# EAGLE board myPanel (EAGLE 7.7.0), part 1 of 2
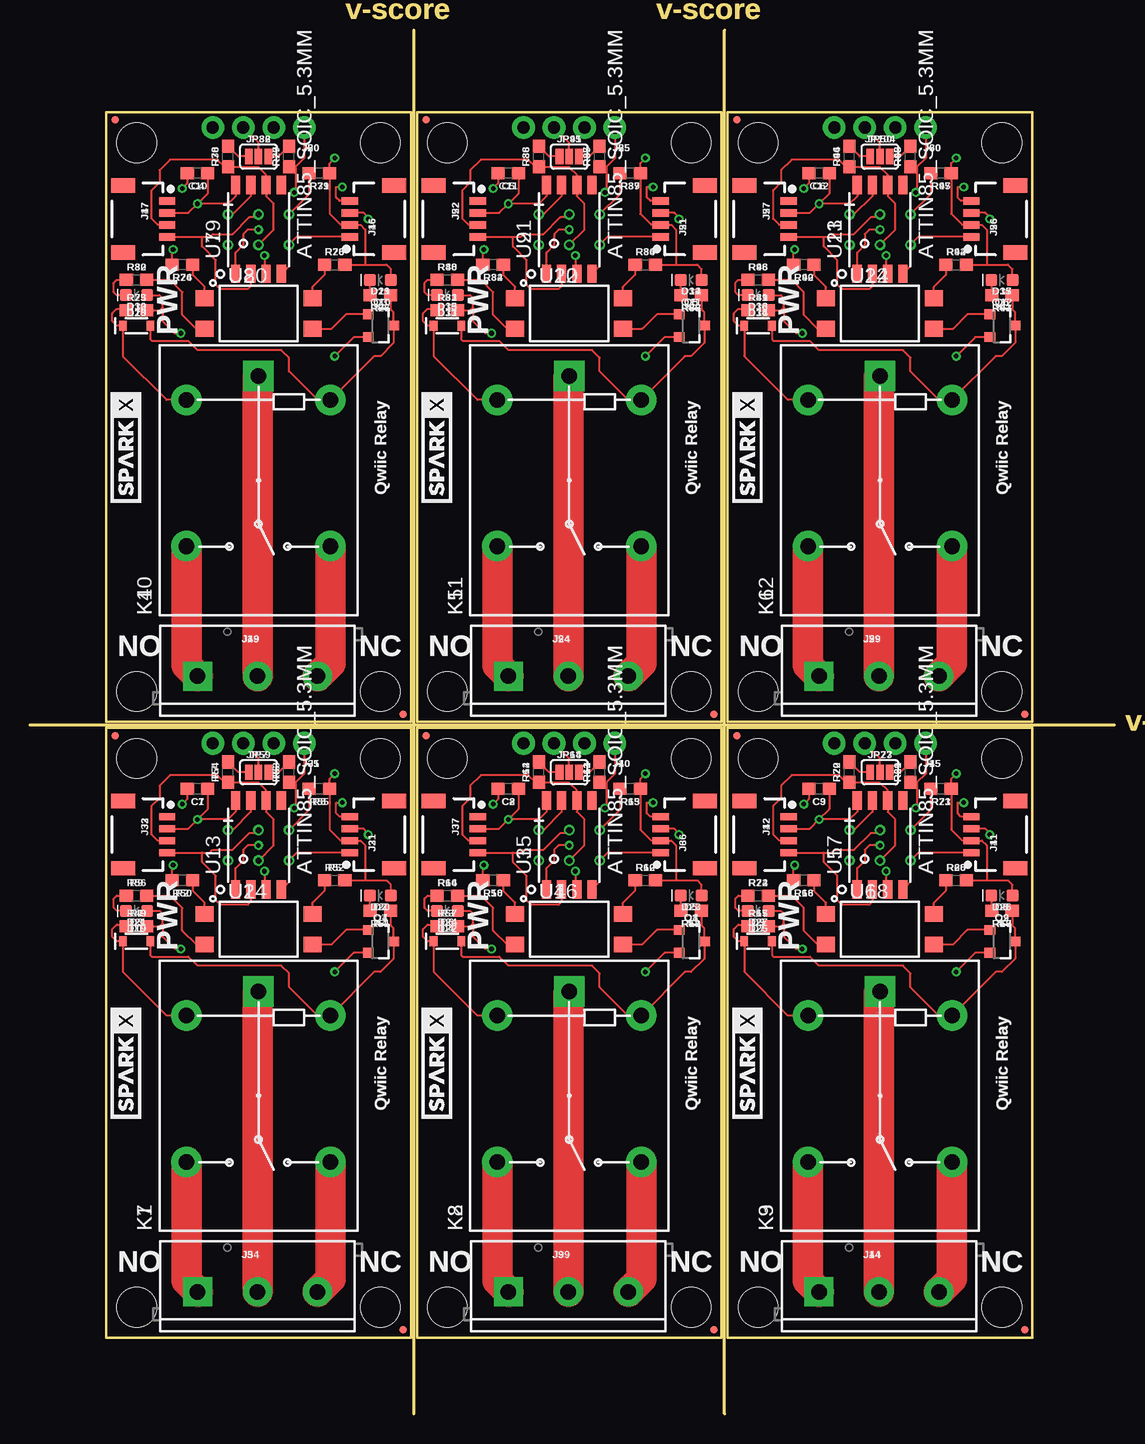
[diagram p0: board, top side]
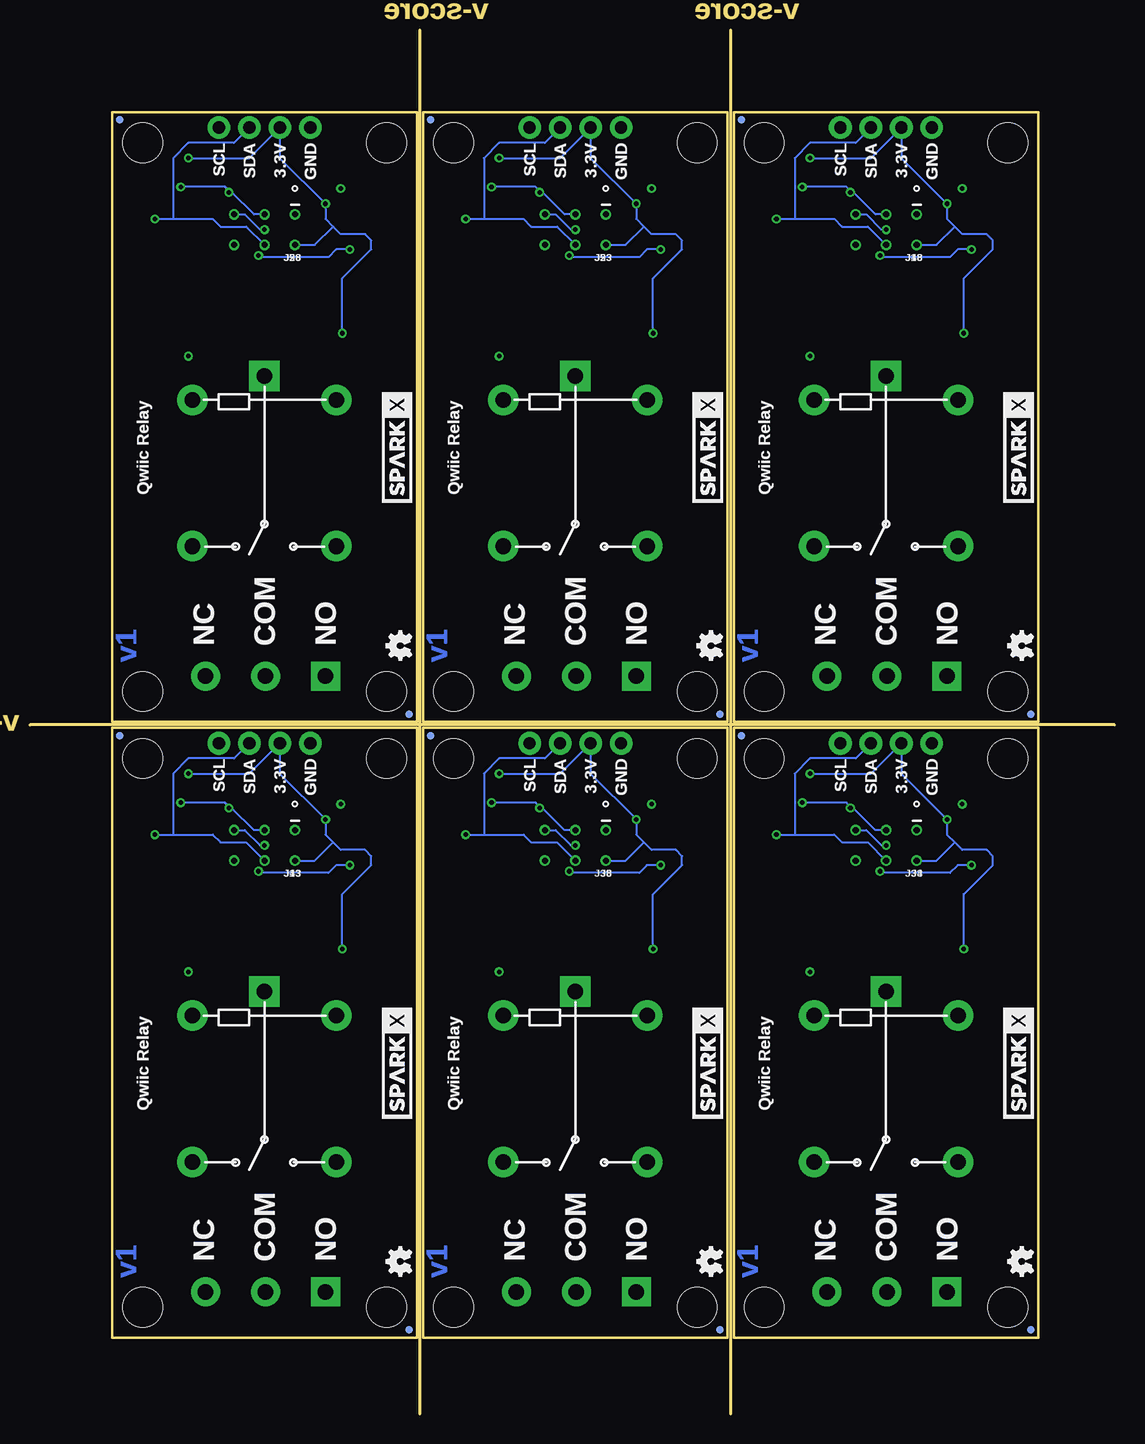
[diagram p1: board, bottom side, seen from below]

Size 90.42 x 115.32 mm. Coordinates in mm from the lower left corner, seen from the top.
Outline: 32,0 32,115.32
Outline: 57.91,0 57.91,115.32
Outline: 0,57.4 90.42,57.4
Outline: 6.35,6.35 31.75,6.35 31.75,57.15 6.35,57.15 6.35,6.35
Outline: 32.26,6.35 57.66,6.35 57.66,57.15 32.26,57.15 32.26,6.35
Outline: 58.17,6.35 83.57,6.35 83.57,57.15 58.17,57.15 58.17,6.35
Outline: 6.35,57.66 31.75,57.66 31.75,108.46 6.35,108.46 6.35,57.66
Outline: 32.26,57.66 57.66,57.66 57.66,108.46 32.26,108.46 32.26,57.66
Outline: 58.17,57.66 83.57,57.66 83.57,108.46 58.17,108.46 58.17,57.66
Copper layers (1*16): Top 0.035mm / dielectric 1.5mm / Bottom 0.035mm
Design rules "SparkFun-2-layer-PCBWay-LIMIT": minimum track width 6mil, minimum drill 0.3mm, track to track 6mil, track to pad 6mil, pad to pad 6mil, via to via 6mil, smd to smd 6mil, copper to edge 6mil, drill to drill 6mil, minimum pad ring 7mil, minimum via ring 7mil, stop-mask expansion 4mil, vias tented up to drill 25mil, thermal gap 10mil

## Footprints (pad centres in the part's own frame; a part is rotated, then mirrored left to right if it is on the bottom)
0603 = smd 1.1 x 1: 1 -0.85,0; 2 0.85,0
SOD-323 = smd 0.63 x 0.83: A 1.15,0; C -1.15,0
LED-0603 = smd 1 x 1: A -0.877,0; C 0.877,0
1X04_NO_SILK = drill 1.016 pad 1.88: 1 0,0; 2 2.54,0; 3 5.08,0; 4 7.62,0
1X04_1MM_RA = smd 0.6 x 1.35: 1 -1.5,0; 2 -0.5,0; 3 0.5,0; 4 1.5,0 | smd 1.2 x 2: NC1 2.8,-3.675; NC2 -2.8,-3.675
2X3_TEST_POINTS = drill 0.508: 1 -2.54,-1.27; 2 -2.54,1.27; 3 0,-1.27; 4 0,1.27; 5 2.54,-1.27; 6 2.54,1.27
SCREWTERMINAL-5MM-3 = drill 1.3 pad 2.413 square: 1 0,0 | drill 1.3 pad 2.413: 2 5,0; 3 10,0
STAND-OFF = hole 3.302: 0,0
MICRO-FIDUCIAL = smd 0.635 x 0.635: 1 0,0
SMT-JUMPER_3_2-NC_PASTE_SILK = smd 0.635 x 1.27: 1 -0.813,0; 2 0,0; 3 0.813,0
RELAY_SPDT_1C = drill 1.3 pad 2.54 square: 1 8.52,-0.005 | drill 1.3 pad 2.54: 2 6.52,5.995; 3 -5.68,5.995; 4 -5.68,-6.005; 5 6.52,-6.005
SOT23-3 = smd 0.8 x 0.9: 1 -0.95,-1; 2 0.95,-1; 3 0,1.1
ATTINY85 = smd 1.524 x 0.762: 1 -3.683,1.905; 2 -3.683,0.635; 3 -3.683,-0.635; 4 -3.683,-1.905; 5 3.727,-1.905; 6 3.727,-0.635; 7 3.727,0.635; 8 3.727,1.905
4PIN_DIP = smd 1.5 x 1.3: 1 -4.5,1.27; 2 -4.5,-1.27; 3 4.5,-1.27; 4 4.5,1.27

## Placement (x,y rotation side)
C1  10uF  [0603]  13.97,52.07 180 top
C2  10uF  [0603]  39.88,52.07 180 top
C3  10uF  [0603]  65.79,52.07 180 top
C4  10uF  [0603]  13.97,103.38 180 top
C5  10uF  [0603]  39.88,103.38 180 top
C6  10uF  [0603]  65.79,103.38 180 top
C7  10uF  [0603]  13.97,52.07 180 top
C8  10uF  [0603]  39.88,52.07 180 top
C9  10uF  [0603]  65.79,52.07 180 top
C10  10uF  [0603]  13.97,103.38 180 top
C11  10uF  [0603]  39.88,103.38 180 top
C12  10uF  [0603]  65.79,103.38 180 top
D1  1A/23V/620mV  [SOD-323]  8.89,39.37 0 top
D2  BLUE  [LED-0603]  29.21,43.18 180 top
D3  RED  [LED-0603]  8.89,41.91 180 top
D4  1A/23V/620mV  [SOD-323]  34.8,39.37 0 top
D5  BLUE  [LED-0603]  55.12,43.18 180 top
D6  RED  [LED-0603]  34.8,41.91 180 top
D7  1A/23V/620mV  [SOD-323]  60.71,39.37 0 top
D8  BLUE  [LED-0603]  81.03,43.18 180 top
D9  RED  [LED-0603]  60.71,41.91 180 top
D10  1A/23V/620mV  [SOD-323]  8.89,90.68 0 top
D11  BLUE  [LED-0603]  29.21,94.49 180 top
D12  RED  [LED-0603]  8.89,93.22 180 top
D13  1A/23V/620mV  [SOD-323]  34.8,90.68 0 top
D14  BLUE  [LED-0603]  55.12,94.49 180 top
D15  RED  [LED-0603]  34.8,93.22 180 top
D16  1A/23V/620mV  [SOD-323]  60.71,90.68 0 top
D17  BLUE  [LED-0603]  81.03,94.49 180 top
D18  RED  [LED-0603]  60.71,93.22 180 top
D19  1A/23V/620mV  [SOD-323]  8.89,39.37 0 top
D20  BLUE  [LED-0603]  29.21,43.18 180 top
D21  RED  [LED-0603]  8.89,41.91 180 top
D22  1A/23V/620mV  [SOD-323]  34.8,39.37 0 top
D23  BLUE  [LED-0603]  55.12,43.18 180 top
D24  RED  [LED-0603]  34.8,41.91 180 top
D25  1A/23V/620mV  [SOD-323]  60.71,39.37 0 top
D26  BLUE  [LED-0603]  81.03,43.18 180 top
D27  RED  [LED-0603]  60.71,41.91 180 top
D28  1A/23V/620mV  [SOD-323]  8.89,90.68 0 top
D29  BLUE  [LED-0603]  29.21,94.49 180 top
D30  RED  [LED-0603]  8.89,93.22 180 top
D31  1A/23V/620mV  [SOD-323]  34.8,90.68 0 top
D32  BLUE  [LED-0603]  55.12,94.49 180 top
D33  RED  [LED-0603]  34.8,93.22 180 top
D34  1A/23V/620mV  [SOD-323]  60.71,90.68 0 top
D35  BLUE  [LED-0603]  81.03,94.49 180 top
D36  RED  [LED-0603]  60.71,93.22 180 top
J1  [1X04_NO_SILK]  22.86,55.88 180 top
J2  Qwiic Right Angle  [1X04_1MM_RA]  26.67,48.26 90 top
J3  Qwiic Right Angle  [1X04_1MM_RA]  11.43,48.26 270 top
J4  AVR_SPI_PROG_3X2TESTPOINTS  [2X3_TEST_POINTS]  19.05,47.37 180 bottom
J5  [SCREWTERMINAL-5MM-3]  13.97,10.16 0 top
J6  Qwiic Right Angle  [1X04_1MM_RA]  52.58,48.26 90 top
J7  Qwiic Right Angle  [1X04_1MM_RA]  37.34,48.26 270 top
J8  AVR_SPI_PROG_3X2TESTPOINTS  [2X3_TEST_POINTS]  44.96,47.37 180 bottom
J9  [SCREWTERMINAL-5MM-3]  39.88,10.16 0 top
J10  [1X04_NO_SILK]  48.77,55.88 180 top
J11  Qwiic Right Angle  [1X04_1MM_RA]  78.49,48.26 90 top
J12  Qwiic Right Angle  [1X04_1MM_RA]  63.25,48.26 270 top
J13  AVR_SPI_PROG_3X2TESTPOINTS  [2X3_TEST_POINTS]  70.87,47.37 180 bottom
J14  [SCREWTERMINAL-5MM-3]  65.79,10.16 0 top
J15  [1X04_NO_SILK]  74.68,55.88 180 top
J16  Qwiic Right Angle  [1X04_1MM_RA]  26.67,99.57 90 top
J17  Qwiic Right Angle  [1X04_1MM_RA]  11.43,99.57 270 top
J18  AVR_SPI_PROG_3X2TESTPOINTS  [2X3_TEST_POINTS]  19.05,98.68 180 bottom
J19  [SCREWTERMINAL-5MM-3]  13.97,61.47 0 top
J20  [1X04_NO_SILK]  22.86,107.19 180 top
J21  Qwiic Right Angle  [1X04_1MM_RA]  52.58,99.57 90 top
J22  Qwiic Right Angle  [1X04_1MM_RA]  37.34,99.57 270 top
J23  AVR_SPI_PROG_3X2TESTPOINTS  [2X3_TEST_POINTS]  44.96,98.68 180 bottom
J24  [SCREWTERMINAL-5MM-3]  39.88,61.47 0 top
J25  [1X04_NO_SILK]  48.77,107.19 180 top
J26  Qwiic Right Angle  [1X04_1MM_RA]  78.49,99.57 90 top
J27  Qwiic Right Angle  [1X04_1MM_RA]  63.25,99.57 270 top
J28  AVR_SPI_PROG_3X2TESTPOINTS  [2X3_TEST_POINTS]  70.87,98.68 180 bottom
J29  [SCREWTERMINAL-5MM-3]  65.79,61.47 0 top
J30  [1X04_NO_SILK]  74.68,107.19 180 top
J31  Qwiic Right Angle  [1X04_1MM_RA]  26.67,48.26 90 top
J32  Qwiic Right Angle  [1X04_1MM_RA]  11.43,48.26 270 top
J33  AVR_SPI_PROG_3X2TESTPOINTS  [2X3_TEST_POINTS]  19.05,47.37 180 bottom
J34  [SCREWTERMINAL-5MM-3]  13.97,10.16 0 top
J35  [1X04_NO_SILK]  22.86,55.88 180 top
J36  Qwiic Right Angle  [1X04_1MM_RA]  52.58,48.26 90 top
J37  Qwiic Right Angle  [1X04_1MM_RA]  37.34,48.26 270 top
J38  AVR_SPI_PROG_3X2TESTPOINTS  [2X3_TEST_POINTS]  44.96,47.37 180 bottom
J39  [SCREWTERMINAL-5MM-3]  39.88,10.16 0 top
J40  [1X04_NO_SILK]  48.77,55.88 180 top
J41  Qwiic Right Angle  [1X04_1MM_RA]  78.49,48.26 90 top
J42  Qwiic Right Angle  [1X04_1MM_RA]  63.25,48.26 270 top
J43  AVR_SPI_PROG_3X2TESTPOINTS  [2X3_TEST_POINTS]  70.87,47.37 180 bottom
J44  [SCREWTERMINAL-5MM-3]  65.79,10.16 0 top
J45  [1X04_NO_SILK]  74.68,55.88 180 top
J46  Qwiic Right Angle  [1X04_1MM_RA]  26.67,99.57 90 top
J47  Qwiic Right Angle  [1X04_1MM_RA]  11.43,99.57 270 top
J48  AVR_SPI_PROG_3X2TESTPOINTS  [2X3_TEST_POINTS]  19.05,98.68 180 bottom
J49  [SCREWTERMINAL-5MM-3]  13.97,61.47 0 top
J50  [1X04_NO_SILK]  22.86,107.19 180 top
J51  Qwiic Right Angle  [1X04_1MM_RA]  52.58,99.57 90 top
J52  Qwiic Right Angle  [1X04_1MM_RA]  37.34,99.57 270 top
J53  AVR_SPI_PROG_3X2TESTPOINTS  [2X3_TEST_POINTS]  44.96,98.68 180 bottom
J54  [SCREWTERMINAL-5MM-3]  39.88,61.47 0 top
J55  [1X04_NO_SILK]  48.77,107.19 180 top
J56  Qwiic Right Angle  [1X04_1MM_RA]  78.49,99.57 90 top
J57  Qwiic Right Angle  [1X04_1MM_RA]  63.25,99.57 270 top
J58  AVR_SPI_PROG_3X2TESTPOINTS  [2X3_TEST_POINTS]  70.87,98.68 180 bottom
J59  [SCREWTERMINAL-5MM-3]  65.79,61.47 0 top
J60  [1X04_NO_SILK]  74.68,107.19 180 top
JP1  STAND-OFF  [STAND-OFF]  8.89,8.89 0 top
JP2  FIDUCIALUFIDUCIAL  [MICRO-FIDUCIAL]  31.12,56.52 0 bottom
JP3  STAND-OFF  [STAND-OFF]  8.89,54.61 0 top
JP4  STAND-OFF  [STAND-OFF]  29.21,54.61 0 top
JP5  STAND-OFF  [STAND-OFF]  29.21,8.89 0 top
JP6  FIDUCIALUFIDUCIAL  [MICRO-FIDUCIAL]  6.98,6.98 0 bottom
JP7  [SMT-JUMPER_3_2-NC_PASTE_SILK]  19.05,53.47 0 top
JP8  FIDUCIALUFIDUCIAL  [MICRO-FIDUCIAL]  31.12,6.98 0 top
JP9  FIDUCIALUFIDUCIAL  [MICRO-FIDUCIAL]  7.11,56.52 0 top
JP10  STAND-OFF  [STAND-OFF]  34.8,54.61 0 top
JP11  STAND-OFF  [STAND-OFF]  55.12,54.61 0 top
JP12  FIDUCIALUFIDUCIAL  [MICRO-FIDUCIAL]  57.02,56.52 0 bottom
JP13  FIDUCIALUFIDUCIAL  [MICRO-FIDUCIAL]  32.89,6.98 0 bottom
JP14  [SMT-JUMPER_3_2-NC_PASTE_SILK]  44.96,53.47 0 top
JP15  STAND-OFF  [STAND-OFF]  34.8,8.89 0 top
JP16  STAND-OFF  [STAND-OFF]  55.12,8.89 0 top
JP17  FIDUCIALUFIDUCIAL  [MICRO-FIDUCIAL]  57.02,6.98 0 top
JP18  FIDUCIALUFIDUCIAL  [MICRO-FIDUCIAL]  33.02,56.52 0 top
JP19  STAND-OFF  [STAND-OFF]  60.71,54.61 0 top
JP20  STAND-OFF  [STAND-OFF]  81.03,54.61 0 top
JP21  FIDUCIALUFIDUCIAL  [MICRO-FIDUCIAL]  82.93,56.52 0 bottom
JP22  FIDUCIALUFIDUCIAL  [MICRO-FIDUCIAL]  58.8,6.98 0 bottom
JP23  [SMT-JUMPER_3_2-NC_PASTE_SILK]  70.87,53.47 0 top
JP24  STAND-OFF  [STAND-OFF]  60.71,8.89 0 top
JP25  STAND-OFF  [STAND-OFF]  81.03,8.89 0 top
JP26  FIDUCIALUFIDUCIAL  [MICRO-FIDUCIAL]  82.93,6.98 0 top
JP27  FIDUCIALUFIDUCIAL  [MICRO-FIDUCIAL]  58.93,56.52 0 top
JP28  STAND-OFF  [STAND-OFF]  8.89,105.92 0 top
JP29  STAND-OFF  [STAND-OFF]  29.21,105.92 0 top
JP30  FIDUCIALUFIDUCIAL  [MICRO-FIDUCIAL]  31.12,107.82 0 bottom
JP31  FIDUCIALUFIDUCIAL  [MICRO-FIDUCIAL]  6.98,58.29 0 bottom
JP32  [SMT-JUMPER_3_2-NC_PASTE_SILK]  19.05,104.77 0 top
JP33  STAND-OFF  [STAND-OFF]  8.89,60.2 0 top
JP34  STAND-OFF  [STAND-OFF]  29.21,60.2 0 top
JP35  FIDUCIALUFIDUCIAL  [MICRO-FIDUCIAL]  31.12,58.29 0 top
JP36  FIDUCIALUFIDUCIAL  [MICRO-FIDUCIAL]  7.11,107.82 0 top
JP37  STAND-OFF  [STAND-OFF]  34.8,105.92 0 top
JP38  STAND-OFF  [STAND-OFF]  55.12,105.92 0 top
JP39  FIDUCIALUFIDUCIAL  [MICRO-FIDUCIAL]  57.02,107.82 0 bottom
JP40  FIDUCIALUFIDUCIAL  [MICRO-FIDUCIAL]  32.89,58.29 0 bottom
JP41  [SMT-JUMPER_3_2-NC_PASTE_SILK]  44.96,104.77 0 top
JP42  STAND-OFF  [STAND-OFF]  34.8,60.2 0 top
JP43  STAND-OFF  [STAND-OFF]  55.12,60.2 0 top
JP44  FIDUCIALUFIDUCIAL  [MICRO-FIDUCIAL]  57.02,58.29 0 top
JP45  FIDUCIALUFIDUCIAL  [MICRO-FIDUCIAL]  33.02,107.82 0 top
JP46  STAND-OFF  [STAND-OFF]  60.71,105.92 0 top
JP47  STAND-OFF  [STAND-OFF]  81.03,105.92 0 top
JP48  FIDUCIALUFIDUCIAL  [MICRO-FIDUCIAL]  82.93,107.82 0 bottom
JP49  FIDUCIALUFIDUCIAL  [MICRO-FIDUCIAL]  58.8,58.29 0 bottom
JP50  [SMT-JUMPER_3_2-NC_PASTE_SILK]  70.87,104.77 0 top
JP51  STAND-OFF  [STAND-OFF]  60.71,60.2 0 top
JP52  STAND-OFF  [STAND-OFF]  81.03,60.2 0 top
JP53  FIDUCIALUFIDUCIAL  [MICRO-FIDUCIAL]  82.93,58.29 0 top
JP54  FIDUCIALUFIDUCIAL  [MICRO-FIDUCIAL]  58.93,107.82 0 top
JP55  STAND-OFF  [STAND-OFF]  8.89,54.61 0 top
JP56  STAND-OFF  [STAND-OFF]  29.21,54.61 0 top
JP57  FIDUCIALUFIDUCIAL  [MICRO-FIDUCIAL]  31.12,56.52 0 bottom
JP58  FIDUCIALUFIDUCIAL  [MICRO-FIDUCIAL]  6.98,6.98 0 bottom
JP59  [SMT-JUMPER_3_2-NC_PASTE_SILK]  19.05,53.47 0 top
JP60  STAND-OFF  [STAND-OFF]  8.89,8.89 0 top
JP61  STAND-OFF  [STAND-OFF]  29.21,8.89 0 top
JP62  FIDUCIALUFIDUCIAL  [MICRO-FIDUCIAL]  31.12,6.98 0 top
JP63  FIDUCIALUFIDUCIAL  [MICRO-FIDUCIAL]  7.11,56.52 0 top
JP64  STAND-OFF  [STAND-OFF]  34.8,54.61 0 top
JP65  STAND-OFF  [STAND-OFF]  55.12,54.61 0 top
JP66  FIDUCIALUFIDUCIAL  [MICRO-FIDUCIAL]  57.02,56.52 0 bottom
JP67  FIDUCIALUFIDUCIAL  [MICRO-FIDUCIAL]  32.89,6.98 0 bottom
JP68  [SMT-JUMPER_3_2-NC_PASTE_SILK]  44.96,53.47 0 top
JP69  STAND-OFF  [STAND-OFF]  34.8,8.89 0 top
JP70  STAND-OFF  [STAND-OFF]  55.12,8.89 0 top
JP71  FIDUCIALUFIDUCIAL  [MICRO-FIDUCIAL]  57.02,6.98 0 top
JP72  FIDUCIALUFIDUCIAL  [MICRO-FIDUCIAL]  33.02,56.52 0 top
JP73  STAND-OFF  [STAND-OFF]  60.71,54.61 0 top
JP74  STAND-OFF  [STAND-OFF]  81.03,54.61 0 top
JP75  FIDUCIALUFIDUCIAL  [MICRO-FIDUCIAL]  82.93,56.52 0 bottom
JP76  FIDUCIALUFIDUCIAL  [MICRO-FIDUCIAL]  58.8,6.98 0 bottom
JP77  [SMT-JUMPER_3_2-NC_PASTE_SILK]  70.87,53.47 0 top
JP78  STAND-OFF  [STAND-OFF]  60.71,8.89 0 top
JP79  STAND-OFF  [STAND-OFF]  81.03,8.89 0 top
JP80  FIDUCIALUFIDUCIAL  [MICRO-FIDUCIAL]  82.93,6.98 0 top
JP81  FIDUCIALUFIDUCIAL  [MICRO-FIDUCIAL]  58.93,56.52 0 top
JP82  STAND-OFF  [STAND-OFF]  8.89,105.92 0 top
JP83  STAND-OFF  [STAND-OFF]  29.21,105.92 0 top
JP84  FIDUCIALUFIDUCIAL  [MICRO-FIDUCIAL]  31.12,107.82 0 bottom
JP85  FIDUCIALUFIDUCIAL  [MICRO-FIDUCIAL]  6.98,58.29 0 bottom
JP86  [SMT-JUMPER_3_2-NC_PASTE_SILK]  19.05,104.77 0 top
JP87  STAND-OFF  [STAND-OFF]  8.89,60.2 0 top
JP88  STAND-OFF  [STAND-OFF]  29.21,60.2 0 top
JP89  FIDUCIALUFIDUCIAL  [MICRO-FIDUCIAL]  31.12,58.29 0 top
JP90  FIDUCIALUFIDUCIAL  [MICRO-FIDUCIAL]  7.11,107.82 0 top
JP91  STAND-OFF  [STAND-OFF]  34.8,105.92 0 top
JP92  STAND-OFF  [STAND-OFF]  55.12,105.92 0 top
JP93  FIDUCIALUFIDUCIAL  [MICRO-FIDUCIAL]  57.02,107.82 0 bottom
JP94  FIDUCIALUFIDUCIAL  [MICRO-FIDUCIAL]  32.89,58.29 0 bottom
JP95  [SMT-JUMPER_3_2-NC_PASTE_SILK]  44.96,104.77 0 top
JP96  STAND-OFF  [STAND-OFF]  34.8,60.2 0 top
JP97  STAND-OFF  [STAND-OFF]  55.12,60.2 0 top
JP98  FIDUCIALUFIDUCIAL  [MICRO-FIDUCIAL]  57.02,58.29 0 top
JP99  FIDUCIALUFIDUCIAL  [MICRO-FIDUCIAL]  33.02,107.82 0 top
JP100  STAND-OFF  [STAND-OFF]  60.71,105.92 0 top
JP101  STAND-OFF  [STAND-OFF]  81.03,105.92 0 top
JP102  FIDUCIALUFIDUCIAL  [MICRO-FIDUCIAL]  82.93,107.82 0 bottom
JP103  FIDUCIALUFIDUCIAL  [MICRO-FIDUCIAL]  58.8,58.29 0 bottom
JP104  [SMT-JUMPER_3_2-NC_PASTE_SILK]  70.87,104.77 0 top
JP105  STAND-OFF  [STAND-OFF]  60.71,60.2 0 top
JP106  STAND-OFF  [STAND-OFF]  81.03,60.2 0 top
JP107  FIDUCIALUFIDUCIAL  [MICRO-FIDUCIAL]  82.93,58.29 0 top
JP108  FIDUCIALUFIDUCIAL  [MICRO-FIDUCIAL]  58.93,107.82 0 top
K1  [RELAY_SPDT_1C]  19.05,26.67 90 top
K2  [RELAY_SPDT_1C]  44.96,26.67 90 top
K3  [RELAY_SPDT_1C]  70.87,26.67 90 top
K4  [RELAY_SPDT_1C]  19.05,77.98 90 top
K5  [RELAY_SPDT_1C]  44.96,77.98 90 top
K6  [RELAY_SPDT_1C]  70.87,77.98 90 top
K7  [RELAY_SPDT_1C]  19.05,26.67 90 top
K8  [RELAY_SPDT_1C]  44.96,26.67 90 top
K9  [RELAY_SPDT_1C]  70.87,26.67 90 top
K10  [RELAY_SPDT_1C]  19.05,77.98 90 top
K11  [RELAY_SPDT_1C]  44.96,77.98 90 top
K12  [RELAY_SPDT_1C]  70.87,77.98 90 top
LOGO1  OSHW-LOGOMINI  [OSHW-LOGO-MINI]  7.75,12.7 90 bottom
LOGO2  OSHW-LOGOMINI  [OSHW-LOGO-MINI]  33.66,12.7 90 bottom
LOGO3  OSHW-LOGOMINI  [OSHW-LOGO-MINI]  59.56,12.7 90 bottom
LOGO4  OSHW-LOGOMINI  [OSHW-LOGO-MINI]  7.75,64.01 90 bottom
LOGO5  OSHW-LOGOMINI  [OSHW-LOGO-MINI]  33.66,64.01 90 bottom
LOGO6  OSHW-LOGOMINI  [OSHW-LOGO-MINI]  59.56,64.01 90 bottom
LOGO7  OSHW-LOGOMINI  [OSHW-LOGO-MINI]  7.75,12.7 90 bottom
LOGO8  OSHW-LOGOMINI  [OSHW-LOGO-MINI]  33.66,12.7 90 bottom
LOGO9  OSHW-LOGOMINI  [OSHW-LOGO-MINI]  59.56,12.7 90 bottom
LOGO10  OSHW-LOGOMINI  [OSHW-LOGO-MINI]  7.75,64.01 90 bottom
LOGO11  OSHW-LOGOMINI  [OSHW-LOGO-MINI]  33.66,64.01 90 bottom
LOGO12  OSHW-LOGOMINI  [OSHW-LOGO-MINI]  59.56,64.01 90 bottom
Q1  600mA/40V  [SOT23-3]  55.12,39.37 270 top
Q2  600mA/40V  [SOT23-3]  81.03,39.37 270 top
Q3  600mA/40V  [SOT23-3]  29.21,90.68 270 top
Q4  600mA/40V  [SOT23-3]  29.21,39.37 270 top
Q5  600mA/40V  [SOT23-3]  55.12,90.68 270 top
Q6  600mA/40V  [SOT23-3]  81.03,90.68 270 top
Q7  600mA/40V  [SOT23-3]  29.21,39.37 270 top
Q8  600mA/40V  [SOT23-3]  55.12,39.37 270 top
Q9  600mA/40V  [SOT23-3]  81.03,39.37 270 top
Q10  600mA/40V  [SOT23-3]  29.21,90.68 270 top
Q11  600mA/40V  [SOT23-3]  55.12,90.68 270 top
Q12  600mA/40V  [SOT23-3]  81.03,90.68 270 top
R1  10  [0603]  8.89,40.64 0 top
R2  100  [0603]  12.7,44.45 180 top
R3  10  [0603]  34.8,40.64 0 top
R4  330  [0603]  29.21,41.91 180 top
R5  330  [0603]  25.4,44.45 0 top
R6  2.2K  [0603]  21.59,53.47 90 top
R7  2.2K  [0603]  16.51,53.47 90 top
R8  10K  [0603]  24.13,52.07 180 top
R9  1k  [0603]  8.89,43.18 0 top
R10  100  [0603]  38.61,44.45 180 top
R11  330  [0603]  55.12,41.91 180 top
R12  330  [0603]  51.31,44.45 0 top
R13  2.2K  [0603]  47.5,53.47 90 top
R14  2.2K  [0603]  42.42,53.47 90 top
R15  10K  [0603]  50.04,52.07 180 top
R16  1k  [0603]  34.8,43.18 0 top
R17  10  [0603]  60.71,40.64 0 top
R18  100  [0603]  64.52,44.45 180 top
R19  330  [0603]  81.03,41.91 180 top
R20  330  [0603]  77.22,44.45 0 top
R21  2.2K  [0603]  73.41,53.47 90 top
R22  2.2K  [0603]  68.33,53.47 90 top
R23  10K  [0603]  75.95,52.07 180 top
R24  1k  [0603]  60.71,43.18 0 top
R25  10  [0603]  8.89,91.95 0 top
R26  100  [0603]  12.7,95.76 180 top
R27  330  [0603]  29.21,93.22 180 top
R28  330  [0603]  25.4,95.76 0 top
R29  2.2K  [0603]  21.59,104.77 90 top
R30  2.2K  [0603]  16.51,104.77 90 top
R31  10K  [0603]  24.13,103.38 180 top
R32  1k  [0603]  8.89,94.49 0 top
R33  10  [0603]  34.8,91.95 0 top
R34  100  [0603]  38.61,95.76 180 top
R35  330  [0603]  55.12,93.22 180 top
R36  330  [0603]  51.31,95.76 0 top
R37  2.2K  [0603]  47.5,104.77 90 top
R38  2.2K  [0603]  42.42,104.77 90 top
R39  10K  [0603]  50.04,103.38 180 top
R40  1k  [0603]  34.8,94.49 0 top
R41  10  [0603]  60.71,91.95 0 top
R42  100  [0603]  64.52,95.76 180 top
R43  330  [0603]  81.03,93.22 180 top
R44  330  [0603]  77.22,95.76 0 top
R45  2.2K  [0603]  73.41,104.77 90 top
R46  2.2K  [0603]  68.33,104.77 90 top
R47  10K  [0603]  75.95,103.38 180 top
R48  1k  [0603]  60.71,94.49 0 top
R49  10  [0603]  8.89,40.64 0 top
R50  100  [0603]  12.7,44.45 180 top
R51  330  [0603]  29.21,41.91 180 top
R52  330  [0603]  25.4,44.45 0 top
R53  2.2K  [0603]  21.59,53.47 90 top
R54  2.2K  [0603]  16.51,53.47 90 top
R55  10K  [0603]  24.13,52.07 180 top
R56  1k  [0603]  8.89,43.18 0 top
R57  10  [0603]  34.8,40.64 0 top
R58  100  [0603]  38.61,44.45 180 top
R59  330  [0603]  55.12,41.91 180 top
R60  330  [0603]  51.31,44.45 0 top
R61  2.2K  [0603]  47.5,53.47 90 top
R62  2.2K  [0603]  42.42,53.47 90 top
R63  10K  [0603]  50.04,52.07 180 top
R64  1k  [0603]  34.8,43.18 0 top
R65  10  [0603]  60.71,40.64 0 top
R66  100  [0603]  64.52,44.45 180 top
R67  330  [0603]  81.03,41.91 180 top
R68  330  [0603]  77.22,44.45 0 top
R69  2.2K  [0603]  73.41,53.47 90 top
R70  2.2K  [0603]  68.33,53.47 90 top
R71  10K  [0603]  75.95,52.07 180 top
R72  1k  [0603]  60.71,43.18 0 top
R73  10  [0603]  8.89,91.95 0 top
R74  100  [0603]  12.7,95.76 180 top
R75  330  [0603]  29.21,93.22 180 top
R76  330  [0603]  25.4,95.76 0 top
R77  2.2K  [0603]  21.59,104.77 90 top
R78  2.2K  [0603]  16.51,104.77 90 top
R79  10K  [0603]  24.13,103.38 180 top
R80  1k  [0603]  8.89,94.49 0 top
R81  10  [0603]  34.8,91.95 0 top
R82  100  [0603]  38.61,95.76 180 top
R83  330  [0603]  55.12,93.22 180 top
R84  330  [0603]  51.31,95.76 0 top
R85  2.2K  [0603]  47.5,104.77 90 top
R86  2.2K  [0603]  42.42,104.77 90 top
R87  10K  [0603]  50.04,103.38 180 top
R88  1k  [0603]  34.8,94.49 0 top
R89  10  [0603]  60.71,91.95 0 top
R90  100  [0603]  64.52,95.76 180 top
R91  330  [0603]  81.03,93.22 180 top
R92  330  [0603]  77.22,95.76 0 top
R93  2.2K  [0603]  73.41,104.77 90 top
R94  2.2K  [0603]  68.33,104.77 90 top
R95  10K  [0603]  75.95,103.38 180 top
R96  1k  [0603]  60.71,94.49 0 top
U1  ATTIN85_SOIC_5.3MM  [ATTINY85]  19.05,47.37 90 top
U2  OPTO_ISOLATOR_DIP  [4PIN_DIP]  19.05,40.39 0 top
U3  ATTIN85_SOIC_5.3MM  [ATTINY85]  44.96,47.37 90 top
U4  OPTO_ISOLATOR_DIP  [4PIN_DIP]  44.96,40.39 0 top
U5  ATTIN85_SOIC_5.3MM  [ATTINY85]  70.87,47.37 90 top
U6  OPTO_ISOLATOR_DIP  [4PIN_DIP]  70.87,40.39 0 top
U7  ATTIN85_SOIC_5.3MM  [ATTINY85]  19.05,98.68 90 top
U8  OPTO_ISOLATOR_DIP  [4PIN_DIP]  19.05,91.69 0 top
U9  ATTIN85_SOIC_5.3MM  [ATTINY85]  44.96,98.68 90 top
U10  OPTO_ISOLATOR_DIP  [4PIN_DIP]  44.96,91.69 0 top
U11  ATTIN85_SOIC_5.3MM  [ATTINY85]  70.87,98.68 90 top
U12  OPTO_ISOLATOR_DIP  [4PIN_DIP]  70.87,91.69 0 top
U13  ATTIN85_SOIC_5.3MM  [ATTINY85]  19.05,47.37 90 top
U14  OPTO_ISOLATOR_DIP  [4PIN_DIP]  19.05,40.39 0 top
U15  ATTIN85_SOIC_5.3MM  [ATTINY85]  44.96,47.37 90 top
U16  OPTO_ISOLATOR_DIP  [4PIN_DIP]  44.96,40.39 0 top
U17  ATTIN85_SOIC_5.3MM  [ATTINY85]  70.87,47.37 90 top
U18  OPTO_ISOLATOR_DIP  [4PIN_DIP]  70.87,40.39 0 top
U19  ATTIN85_SOIC_5.3MM  [ATTINY85]  19.05,98.68 90 top
U20  OPTO_ISOLATOR_DIP  [4PIN_DIP]  19.05,91.69 0 top
U21  ATTIN85_SOIC_5.3MM  [ATTINY85]  44.96,98.68 90 top
U22  OPTO_ISOLATOR_DIP  [4PIN_DIP]  44.96,91.69 0 top
U23  ATTIN85_SOIC_5.3MM  [ATTINY85]  70.87,98.68 90 top
U24  OPTO_ISOLATOR_DIP  [4PIN_DIP]  70.87,91.69 0 top
U$1  SPARKX-LOGO4  [SPARKX-MEDIUM]  33.91,29.21 90 top
U$2  SPARKX-LOGO4  [SPARKX-MEDIUM]  33.91,29.21 90 bottom
U$3  SPARKX-LOGO4  [SPARKX-MEDIUM]  8,29.21 90 top
U$4  SPARKX-LOGO4  [SPARKX-MEDIUM]  8,29.21 90 bottom
U$5  SPARKX-LOGO4  [SPARKX-MEDIUM]  59.82,29.21 90 top
U$6  SPARKX-LOGO4  [SPARKX-MEDIUM]  59.82,29.21 90 bottom
U$7  SPARKX-LOGO4  [SPARKX-MEDIUM]  8,80.52 90 top
U$8  SPARKX-LOGO4  [SPARKX-MEDIUM]  8,80.52 90 bottom
U$9  SPARKX-LOGO4  [SPARKX-MEDIUM]  33.91,80.52 90 top
U$10  SPARKX-LOGO4  [SPARKX-MEDIUM]  33.91,80.52 90 bottom
U$11  SPARKX-LOGO4  [SPARKX-MEDIUM]  59.82,80.52 90 top
U$12  SPARKX-LOGO4  [SPARKX-MEDIUM]  59.82,80.52 90 bottom
U$13  SPARKX-LOGO4  [SPARKX-MEDIUM]  8,29.21 90 top
U$14  SPARKX-LOGO4  [SPARKX-MEDIUM]  8,29.21 90 bottom
U$15  SPARKX-LOGO4  [SPARKX-MEDIUM]  33.91,29.21 90 top
U$16  SPARKX-LOGO4  [SPARKX-MEDIUM]  33.91,29.21 90 bottom
U$17  SPARKX-LOGO4  [SPARKX-MEDIUM]  59.82,29.21 90 top
U$18  SPARKX-LOGO4  [SPARKX-MEDIUM]  59.82,29.21 90 bottom
U$19  SPARKX-LOGO4  [SPARKX-MEDIUM]  8,80.52 90 top
U$20  SPARKX-LOGO4  [SPARKX-MEDIUM]  8,80.52 90 bottom
U$21  SPARKX-LOGO4  [SPARKX-MEDIUM]  33.91,80.52 90 top
U$22  SPARKX-LOGO4  [SPARKX-MEDIUM]  33.91,80.52 90 bottom
U$23  SPARKX-LOGO4  [SPARKX-MEDIUM]  59.82,80.52 90 top
U$24  SPARKX-LOGO4  [SPARKX-MEDIUM]  59.82,80.52 90 bottom

## Library data of the parts
C1-C12 = SparkFun-Capacitors; PROD_ID: CAP-11015
D1 D4 D7 D10 D13 D16 D19 D22 D25 D28 D31 D34 = SparkFun-DiscreteSemi; PROD_ID: DIO-11623
D2 D5 D8 D11 D14 D17 D20 D23 D26 D29 D32 D35 = SparkFun-LED; PROD_ID: DIO-08575
D3 D6 D9 D12 D15 D18 D21 D24 D27 D30 D33 D36 = SparkFun-LED; PROD_ID: DIO-00819
J1 J10 J15 J20 J25 J30 J35 J40 J45 J50 J55 J60 = SparkFun-Connectors; PROD_ID: CONN-09696
J2 J3 J6 J7 J11 J12 J16 J17 J21 J22 J26 J27 J31 J32 J36 J37 J41 J42 J46 J47 J51 J52 J56 J57 = SparkFun-Connectors; PROD_ID: CONN-13694
J4 J8 J13 J18 J23 J28 J33 J38 J43 J48 J53 J58 = SparkFun-Connectors
J5 J9 J14 J19 J24 J29 J34 J39 J44 J49 J54 J59 = SparkFun-Connectors; PROD_ID: CONN-10134; SF_SKU: PRT-08433
JP1-JP6 JP8-JP13 JP15-JP22 JP24-JP31 JP33-JP40 JP42-JP49 JP51-JP58 JP60-JP67 JP69-JP76 JP78-JP85 JP87-JP94 JP96-JP103 JP105-JP108 = SparkFun
JP7 JP14 JP23 JP32 JP41 JP50 JP59 JP68 JP77 JP86 JP95 JP104 = SparkFun-Jumpers
K1-K12 = Relay_SPDT
LOGO1-LOGO12 = SparkFun-Aesthetics
Q1-Q12 = SparkFun-DiscreteSemi; PROD_ID: TRANS-08049
R1 R3 R17 R25 R33 R41 R49 R57 R65 R73 R81 R89 = SparkFun-Resistors; PROD_ID: RES-07871
R2 R10 R18 R26 R34 R42 R50 R58 R66 R74 R82 R90 = SparkFun-Resistors; PROD_ID: RES-12438
R4 R11 R19 R27 R35 R43 R51 R59 R67 R75 R83 R91 = SparkFun-Resistors; PROD_ID: RES_10328
R5 R8 R9 R12 R15 R16 R20 R23 R24 R28 R31 R32 R36 R39 R40 R44 R47 R48 R52 R55 R56 R60 R63 R64 R68 R71 R72 R76 R79 R80 R84 R87 R88 R92 R95 R96 = SparkFun-Resistors; PROD_ID: RES-00818
R6 R7 R13 R14 R21 R22 R29 R30 R37 R38 R45 R46 R53 R54 R61 R62 R69 R70 R77 R78 R85 R86 R93 R94 = SparkFun-Resistors; PROD_ID: RES-07857
U1 U3 U5 U7 U9 U11 U13 U15 U17 U19 U21 U23 = attiny85
U2 U4 U6 U8 U10 U12 U14 U16 U18 U20 U22 U24 = LTV-816
U$1-U$24 = SparkX

## Nets
3.3V: C1.1 D2.A D3.A J1.3 J2.2 J3.2 J4.2 JP7.2 R1.2 R5.2 R8.1 U1.8
3.3V1: C2.1 D5.A D6.A J6.2 J7.2 J8.2 J10.3 JP14.2 R3.2 R12.2 R15.1 U3.8
3.3V2: C3.1 D8.A D9.A J11.2 J12.2 J13.2 J15.3 JP23.2 R17.2 R20.2 R23.1 U5.8
3.3V3: C4.1 D11.A D12.A J16.2 J17.2 J18.2 J20.3 JP32.2 R25.2 R28.2 R31.1 U7.8
3.3V4: C5.1 D14.A D15.A J21.2 J22.2 J23.2 J25.3 JP41.2 R33.2 R36.2 R39.1 U9.8
3.3V5: C6.1 D17.A D18.A J26.2 J27.2 J28.2 J30.3 JP50.2 R41.2 R44.2 R47.1 U11.8
3.3V6: C7.1 D20.A D21.A J31.2 J32.2 J33.2 J35.3 JP59.2 R49.2 R52.2 R55.1 U13.8
3.3V7: C8.1 D23.A D24.A J36.2 J37.2 J38.2 J40.3 JP68.2 R57.2 R60.2 R63.1 U15.8
3.3V8: C9.1 D26.A D27.A J41.2 J42.2 J43.2 J45.3 JP77.2 R65.2 R68.2 R71.1 U17.8
3.3V9: C10.1 D29.A D30.A J46.2 J47.2 J48.2 J50.3 JP86.2 R73.2 R76.2 R79.1 U19.8
3.3V10: C11.1 D32.A D33.A J51.2 J52.2 J53.2 J55.3 JP95.2 R81.2 R84.2 R87.1 U21.8
3.3V11: C12.1 D35.A D36.A J56.2 J57.2 J58.2 J60.3 JP104.2 R89.2 R92.2 R95.1 U23.8
!RESET: J4.5 R8.2 U1.1
!RESET1: J8.5 R15.2 U3.1
!RESET2: J13.5 R23.2 U5.1
!RESET3: J18.5 R31.2 U7.1
!RESET4: J23.5 R39.2 U9.1
!RESET5: J28.5 R47.2 U11.1
!RESET6: J33.5 R55.2 U13.1
!RESET7: J38.5 R63.2 U15.1
!RESET8: J43.5 R71.2 U17.1
!RESET9: J48.5 R79.2 U19.1
!RESET10: J53.5 R87.2 U21.1
!RESET11: J58.5 R95.2 U23.1
COM: J5.2 K1.1
COM1: J9.2 K2.1
COM2: J14.2 K3.1
COM3: J19.2 K4.1
COM4: J24.2 K5.1
COM5: J29.2 K6.1
COM6: J34.2 K7.1
COM7: J39.2 K8.1
COM8: J44.2 K9.1
COM9: J49.2 K10.1
COM10: J54.2 K11.1
COM11: J59.2 K12.1
GND: C1.2 J1.4 J2.1 J3.1 J4.6 Q4.2 R9.2 U1.4 U2.2
GND1: C2.2 J6.1 J7.1 J8.6 J10.4 Q1.2 R16.2 U3.4 U4.2
GND2: C3.2 J11.1 J12.1 J13.6 J15.4 Q2.2 R24.2 U5.4 U6.2
GND3: C4.2 J16.1 J17.1 J18.6 J20.4 Q3.2 R32.2 U7.4 U8.2
GND4: C5.2 J21.1 J22.1 J23.6 J25.4 Q5.2 R40.2 U9.4 U10.2
GND5: C6.2 J26.1 J27.1 J28.6 J30.4 Q6.2 R48.2 U11.4 U12.2
GND6: C7.2 J31.1 J32.1 J33.6 J35.4 Q7.2 R56.2 U13.4 U14.2
GND7: C8.2 J36.1 J37.1 J38.6 J40.4 Q8.2 R64.2 U15.4 U16.2
GND8: C9.2 J41.1 J42.1 J43.6 J45.4 Q9.2 R72.2 U17.4 U18.2
GND9: C10.2 J46.1 J47.1 J48.6 J50.4 Q10.2 R80.2 U19.4 U20.2
GND10: C11.2 J51.1 J52.1 J53.6 J55.4 Q11.2 R88.2 U21.4 U22.2
GND11: C12.2 J56.1 J57.1 J58.6 J60.4 Q12.2 R96.2 U23.4 U24.2
MISO: J4.1 U1.7
MISO1: J8.1 U3.7
MISO2: J13.1 U5.7
MISO3: J18.1 U7.7
MISO4: J23.1 U9.7
MISO5: J28.1 U11.7
MISO6: J33.1 U13.7
MISO7: J38.1 U15.7
MISO8: J43.1 U17.7
MISO9: J48.1 U19.7
MISO10: J53.1 U21.7
MISO11: J58.1 U23.7
N$1: Q4.1 U2.3
N$2: D1.A K1.5 Q4.3 R4.1
N$3: R2.1 U2.1
N$4: JP7.1 R7.2
N$5: D4.A K2.5 Q1.3 R11.1
N$6: D4.C K2.2 R3.1
N$7: D1.C K1.2 R1.1
N$8: D2.C R4.2
N$9: R5.1 U2.4
N$10: JP7.3 R6.2
N$11: D5.C R11.2
N$12: R12.1 U4.4
N$13: D3.C R9.1
N$14: JP14.1 R14.2
N$15: JP14.3 R13.2
N$16: D6.C R16.1
N$17: R10.1 U4.1
N$18: Q1.1 U4.3
N$19: D7.A K3.5 Q2.3 R19.1
N$20: D7.C K3.2 R17.1
N$21: D8.C R19.2
N$22: R20.1 U6.4
N$23: JP23.1 R22.2
N$24: JP23.3 R21.2
N$25: D9.C R24.1
N$26: R18.1 U6.1
N$27: Q2.1 U6.3
N$28: D10.A K4.5 Q3.3 R27.1
N$29: D10.C K4.2 R25.1
N$30: D11.C R27.2
N$31: R28.1 U8.4
N$32: JP32.1 R30.2
N$33: JP32.3 R29.2
N$34: D12.C R32.1
N$35: R26.1 U8.1
N$36: Q3.1 U8.3
N$37: D13.A K5.5 Q5.3 R35.1
N$38: D13.C K5.2 R33.1
N$39: D14.C R35.2
N$40: R36.1 U10.4
N$41: JP41.1 R38.2
N$42: JP41.3 R37.2
N$43: D15.C R40.1
N$44: R34.1 U10.1
N$45: Q5.1 U10.3
N$46: D16.A K6.5 Q6.3 R43.1
N$47: D16.C K6.2 R41.1
N$48: D17.C R43.2
N$49: R44.1 U12.4
N$50: JP50.1 R46.2
N$51: JP50.3 R45.2
N$52: D18.C R48.1
N$53: R42.1 U12.1
N$54: Q6.1 U12.3
N$55: D19.A K7.5 Q7.3 R51.1
N$56: D19.C K7.2 R49.1
N$57: D20.C R51.2
N$58: R52.1 U14.4
N$59: JP59.1 R54.2
N$60: JP59.3 R53.2
N$61: D21.C R56.1
N$62: R50.1 U14.1
N$63: Q7.1 U14.3
N$64: D22.A K8.5 Q8.3 R59.1
N$65: D22.C K8.2 R57.1
N$66: D23.C R59.2
N$67: R60.1 U16.4
N$68: JP68.1 R62.2
N$69: JP68.3 R61.2
N$70: D24.C R64.1
N$71: R58.1 U16.1
N$72: Q8.1 U16.3
N$73: D25.A K9.5 Q9.3 R67.1
N$74: D25.C K9.2 R65.1
N$75: D26.C R67.2
N$76: R68.1 U18.4
N$77: JP77.1 R70.2
N$78: JP77.3 R69.2
N$79: D27.C R72.1
N$80: R66.1 U18.1
N$81: Q9.1 U18.3
N$82: D28.A K10.5 Q10.3 R75.1
N$83: D28.C K10.2 R73.1
N$84: D29.C R75.2
N$85: R76.1 U20.4
N$86: JP86.1 R78.2
N$87: JP86.3 R77.2
N$88: D30.C R80.1
N$89: R74.1 U20.1
N$90: Q10.1 U20.3
N$91: D31.A K11.5 Q11.3 R83.1
N$92: D31.C K11.2 R81.1
N$93: D32.C R83.2
N$94: R84.1 U22.4
N$95: JP95.1 R86.2
N$96: JP95.3 R85.2
N$97: D33.C R88.1
N$98: R82.1 U22.1
N$99: Q11.1 U22.3
N$100: D34.A K12.5 Q12.3 R91.1
N$101: D34.C K12.2 R89.1
N$102: D35.C R91.2
N$103: R92.1 U24.4
N$104: JP104.1 R94.2
N$105: JP104.3 R93.2
N$106: D36.C R96.1
N$107: R90.1 U24.1
N$108: Q12.1 U24.3
NC: J5.3 K1.4
NC1: J9.3 K2.4
NC2: J14.3 K3.4
NC3: J19.3 K4.4
NC4: J24.3 K5.4
NC5: J29.3 K6.4
NC6: J34.3 K7.4
NC7: J39.3 K8.4
NC8: J44.3 K9.4
NC9: J49.3 K10.4
NC10: J54.3 K11.4
NC11: J59.3 K12.4
NO: J5.1 K1.3
NO1: J9.1 K2.3
NO2: J14.1 K3.3
NO3: J19.1 K4.3
NO4: J24.1 K5.3
NO5: J29.1 K6.3
NO6: J34.1 K7.3
NO7: J39.1 K8.3
NO8: J44.1 K9.3
NO9: J49.1 K10.3
NO10: J54.1 K11.3
NO11: J59.1 K12.3
RELAY_CTR: R2.2 U1.3
RELAY_CTR1: R10.2 U3.3
RELAY_CTR2: R18.2 U5.3
RELAY_CTR3: R26.2 U7.3
RELAY_CTR4: R34.2 U9.3
RELAY_CTR5: R42.2 U11.3
RELAY_CTR6: R50.2 U13.3
RELAY_CTR7: R58.2 U15.3
RELAY_CTR8: R66.2 U17.3
RELAY_CTR9: R74.2 U19.3
RELAY_CTR10: R82.2 U21.3
RELAY_CTR11: R90.2 U23.3
SCL: J1.1 J2.4 J3.4 J4.3 R6.1 U1.2
SCL1: J6.4 J7.4 J8.3 J10.1 R13.1 U3.2
SCL2: J11.4 J12.4 J13.3 J15.1 R21.1 U5.2
SCL3: J16.4 J17.4 J18.3 J20.1 R29.1 U7.2
SCL4: J21.4 J22.4 J23.3 J25.1 R37.1 U9.2
SCL5: J26.4 J27.4 J28.3 J30.1 R45.1 U11.2
SCL6: J31.4 J32.4 J33.3 J35.1 R53.1 U13.2
SCL7: J36.4 J37.4 J38.3 J40.1 R61.1 U15.2
SCL8: J41.4 J42.4 J43.3 J45.1 R69.1 U17.2
SCL9: J46.4 J47.4 J48.3 J50.1 R77.1 U19.2
SCL10: J51.4 J52.4 J53.3 J55.1 R85.1 U21.2
SCL11: J56.4 J57.4 J58.3 J60.1 R93.1 U23.2
SDA: J1.2 J2.3 J3.3 J4.4 R7.1 U1.6
SDA1: J6.3 J7.3 J8.4 J10.2 R14.1 U3.6
SDA2: J11.3 J12.3 J13.4 J15.2 R22.1 U5.6
SDA3: J16.3 J17.3 J18.4 J20.2 R30.1 U7.6
SDA4: J21.3 J22.3 J23.4 J25.2 R38.1 U9.6
SDA5: J26.3 J27.3 J28.4 J30.2 R46.1 U11.6
SDA6: J31.3 J32.3 J33.4 J35.2 R54.1 U13.6
SDA7: J36.3 J37.3 J38.4 J40.2 R62.1 U15.6
SDA8: J41.3 J42.3 J43.4 J45.2 R70.1 U17.6
SDA9: J46.3 J47.3 J48.4 J50.2 R78.1 U19.6
SDA10: J51.3 J52.3 J53.4 J55.2 R86.1 U21.6
SDA11: J56.3 J57.3 J58.4 J60.2 R94.1 U23.6